# Altium PCB rev4.PcbDoc
Units mil, origin at the board's own origin, x right, y up, seen from the top; angles counter-clockwise.
Board outline 1000 x 900 mil, 2 copper layers (Top Layer, Bottom Layer); 3 components, 16 nets, 32 pads, 0 vias.
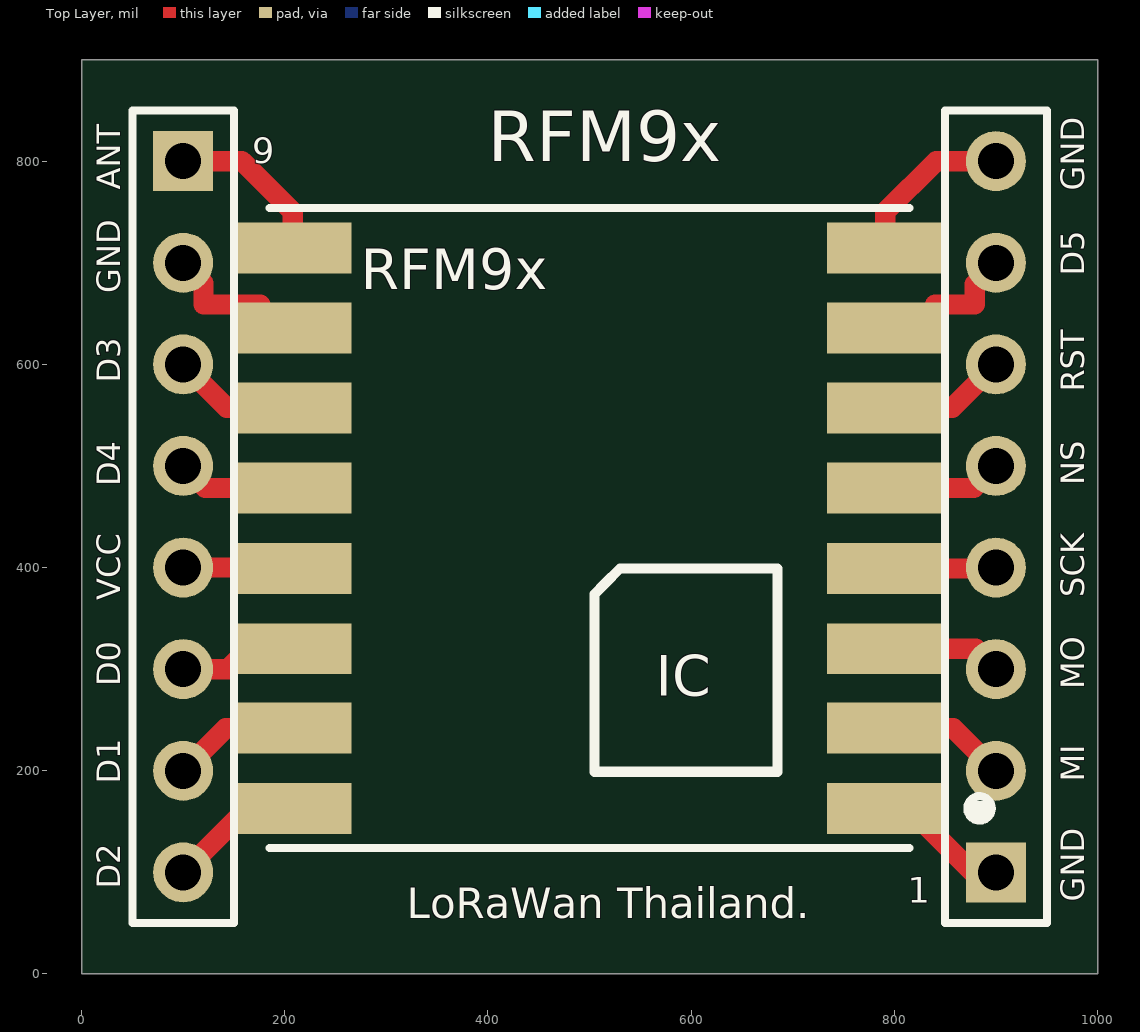
[diagram p0: Top Layer view]
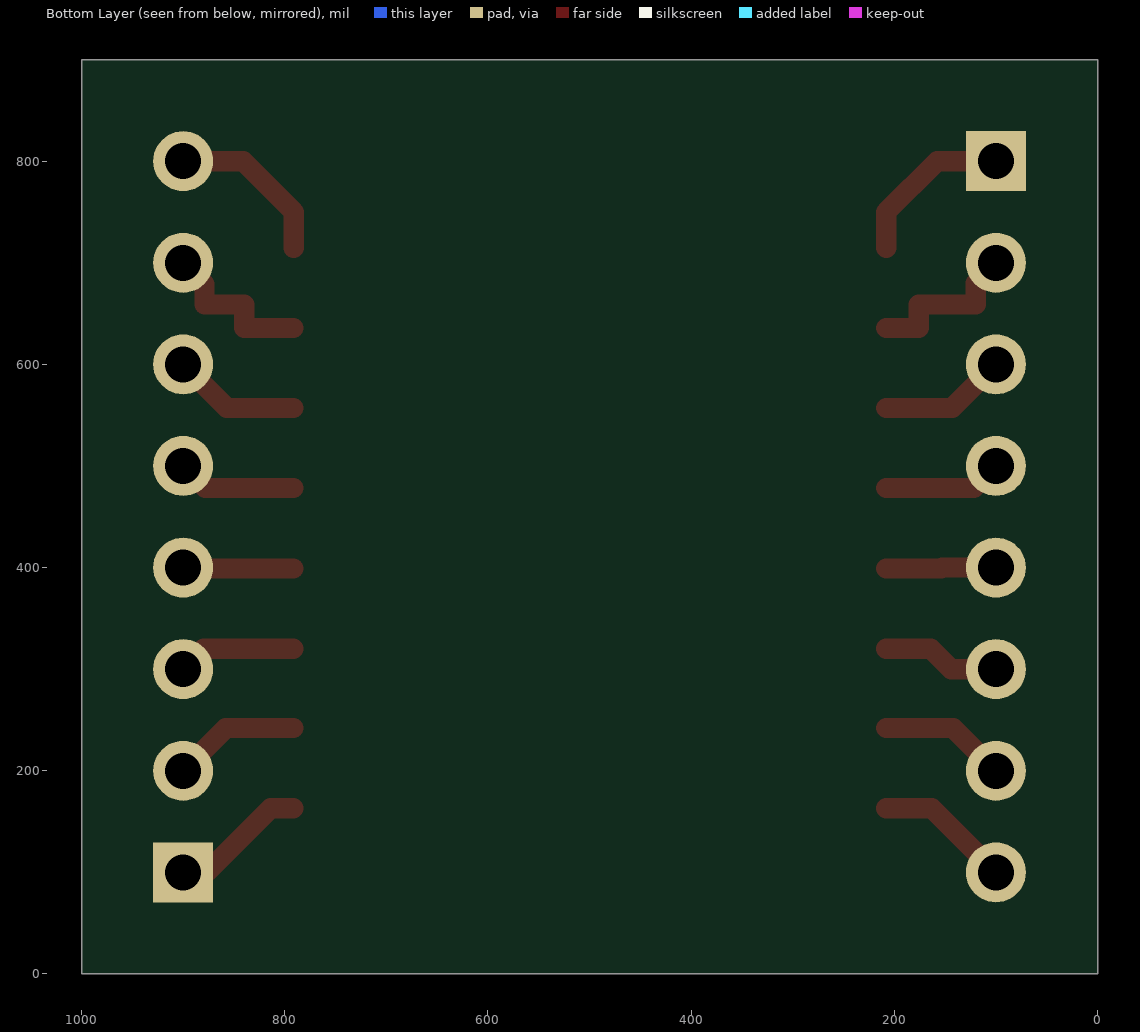
[diagram p1: Bottom Layer view, seen from below]

## Layer stack, top to bottom
Top Solder: solder mask 0.4, Solder Resist, Dk 3.5
Top Layer: signal copper 1.4
Dielectric 1: dielectric 12.6, FR-4, Dk 4.8
Bottom Layer: signal copper 1.4
Bottom Solder: solder mask 0.4, Solder Resist, Dk 3.5

## Board outline
0,0 1000,0 1000,900 0,900

## Design rules (kind name [scope] priority, off if disabled: settings)
Clearance [All] p1: gap=20
PolygonConnect [All] p1: connectstyle=Relief reliefconductorwidth=10 reliefentries=4 polygonreliefangle="90 Angle" airgapwidth=10
RoutingVias [All] p1: holewidth=28 width=50 viastyle="Through Hole" minholewidth=28 minwidth=50 maxholewidth=28 maxwidth=50
SolderMaskExpansion [All] p1: expansion=4
Width [All] p1: maxlimit=20 minlimit=20 preferedwidth=20
30 further rules are at their usual default settings.

## Components (designator, comment, footprint, x,y, rotation, side; value= is the part's Value field where it differs from the comment)
1 "Header 8" HDR1X8 900,100 r90 top (schematic designator P1)
9 "Header 8" HDR1X8 100,800 r270 top (schematic designator P2)
RFM9x "LoRa SX1276" XCVR_RFM95W-868S2 500,439 r180 top

## Footprints (in the part's own frame and the unit in brackets; to place one, negate y for a bottom-side part, rotate by r counter-clockwise, add the part's x,y. Pads: shape width x height; smd on the part's side, far side on the other; paste and mask are expansions set on the pad)
HDR1X8 [mm] "Connector; Header; 8 Position"
  rect 1.5x1.5 hole 0.9: 1(0,0)
  round 1.5 hole 0.9: 2(2.54,0) 3(5.08,0) 4(7.62,0) 5(10.16,0) 6(12.7,0) 7(15.24,0) 8(17.78,0)
  silkscreen extent -1.27,-1.27 19.05,1.27
XCVR_RFM95W-868S2 [mil]
  rect 115x50 smd: 1(-291.34,276) 2(-291.34,197) 3(-291.34,119) 4(-291.34,40) 5(-291.34,-39.37) 6(-291.34,-118.11) 7(-291.34,-196.85) 8(-291.34,-275.59) 9(292,-275.59) 10(292,-196.85) 11(292,-118.11) 12(292,-39.37) 13(292,40) 14(292,119) 15(292,197) 16(292,276)
  silkscreen extent -396,-315 315,315, body extent -315,-313 315,313, height 88

## Part data
1 9: "Header, 8-Pin"
RFM9x: library part RFM95W-868S2

## Nets (pads, with @x,y where several pads share a name; then routed paths per layer and width w, separated by ;. In a path a pad name is that pad's centre, name@x,y a point inside that pad or via, vN(x,y) a via of type N, cw(c..) or ccw(c..) an arc to the next point about the centre after c; other vN are vias at no path point)
NetP1_1: 1.1 RFM9x.1 | length 134.8
  Top Layer w20: RFM9x.1 814,163 877,100 1.1
NetP1_2: 1.2 RFM9x.2 | length 126.1
  Top Layer w20: RFM9x.2 858,242 1.2
NetP1_3: 1.3 RFM9x.3 | length 116.9
  Top Layer w20: RFM9x.3 880,320 1.3
NetP1_4: 1.4 RFM9x.4 | length 109.1
  Top Layer w20: RFM9x.4 899,399 1.4
NetP1_5: 1.5 RFM9x.5 | length 117.6
  Top Layer w20: RFM9x.5 878.37,478.37 1.5
NetP1_6: 1.6 RFM9x.6 | length 126.4
  Top Layer w20: RFM9x.6 857.11,557.11 1.6
NetP1_7: 1.7 RFM9x.7 | length 160.5
  Top Layer w20: RFM9x.7 840,635.85 840,659 879,659 879,679 1.7
NetP1_8: 1.8 RFM9x.8 | length 165.5
  Top Layer w20: RFM9x.8 791,714.59 791,750 841,800 1.8
NetP2_1: 9.1 RFM9x.9 | length 164.1
  Top Layer w20: 9.1 158,800 208,750 RFM9x.9
NetP2_2: 9.2 RFM9x.10 | length 160.4
  Top Layer w20: 9.2 120,680 120,659 176,659 176,635.85 RFM9x.10
NetP2_3: 9.3 RFM9x.11 | length 125.8
  Top Layer w20: 9.3 142.89,557.11 RFM9x.11
NetP2_4: 9.4 RFM9x.12 | length 117
  Top Layer w20: 9.4 121.63,478.37 RFM9x.12
NetP2_5: 9.5 RFM9x.13 | length 108.4
  Top Layer w20: 9.5 153,400 154,399 RFM9x.13
NetP2_6: 9.6 RFM9x.14 | length 116.3
  Top Layer w20: 9.6 144,300 164,320 RFM9x.14
NetP2_7: 9.7 RFM9x.15 | length 125.4
  Top Layer w20: 9.7 142,242 RFM9x.15
NetP2_8: 9.8 RFM9x.16 | length 134.1
  Top Layer w20: 9.8 163,163 RFM9x.16

## Silkscreen, mask and mechanical layers (free items; w line width, h text height)
Top Overlay:
  text "ANT" at 38,772 h23 r90
  text "GND" at 987,771 h23 r90
  text "D5" at 987,687 h23 r90
  text "GND" at 38,670 h23 r90
  text "D3" at 38,582 h23 r90
  text "RST" at 987,573 h23 r90
  text "NS" at 987,481 h23 r90
  text "D4" at 38,480 h23 r90
  text "SCK" at 987,371 h23 r90
  text "VCC" at 38,368 h23 r90
  text "D0" at 38,283 h23 r90
  text "MO" at 987,280 h23 r90
  text "MI" at 987,189 h23 r90
  text "D1" at 38,187 h23 r90
  text "D2" at 38,84 h23 r90
  text "GND" at 987,71 h23 r90
  text "LoRaWan Thailand." at 320,55 h30
Mechanical 1:
  the board outline again, w10
Mechanical 2:
  text "RFM9x" at 400,800 h50
Mechanical 4:
  circle w10: c410,640 r20
  rectangle: 395,625 425,655
  text "TouYunG" at 410,135 h25

## Dimensions
900,100 to 100,100 on Mechanical 16
950,850 to 50,850 on Mechanical 16
1000,0 to 1000,900 on Mechanical 16
0,900 to 1000,900 on Mechanical 16

## Text inside footprints (layer, text, board x,y; h text height)
RFM9x: Top Overlay "IC" at 565,274 h40